# Altium PCB sw108.PcbDoc
Units mil, origin at the board's own origin, x right, y up, seen from the top; angles counter-clockwise.
Board outline 6000 x 4000 mil, 2 copper layers (Top Layer, Bottom Layer); 39 components, 28 nets, 165 pads, 26 vias.
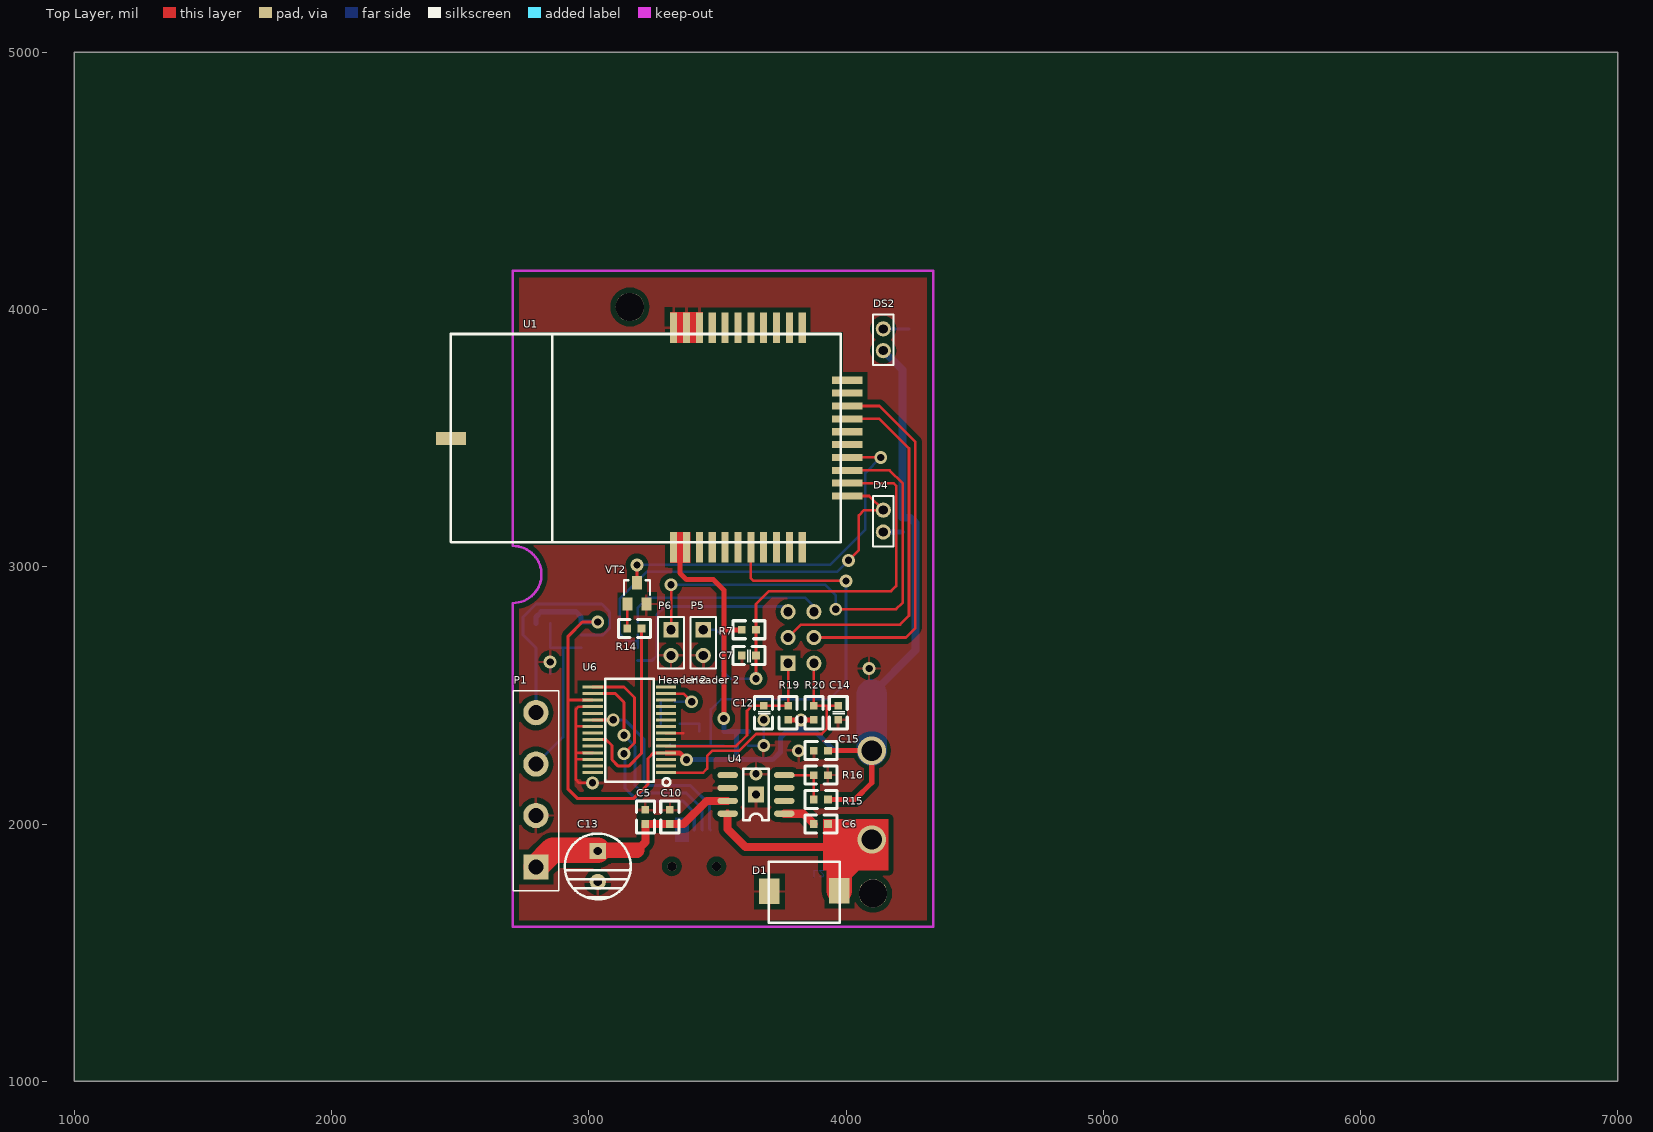
[diagram p0: Top Layer view]
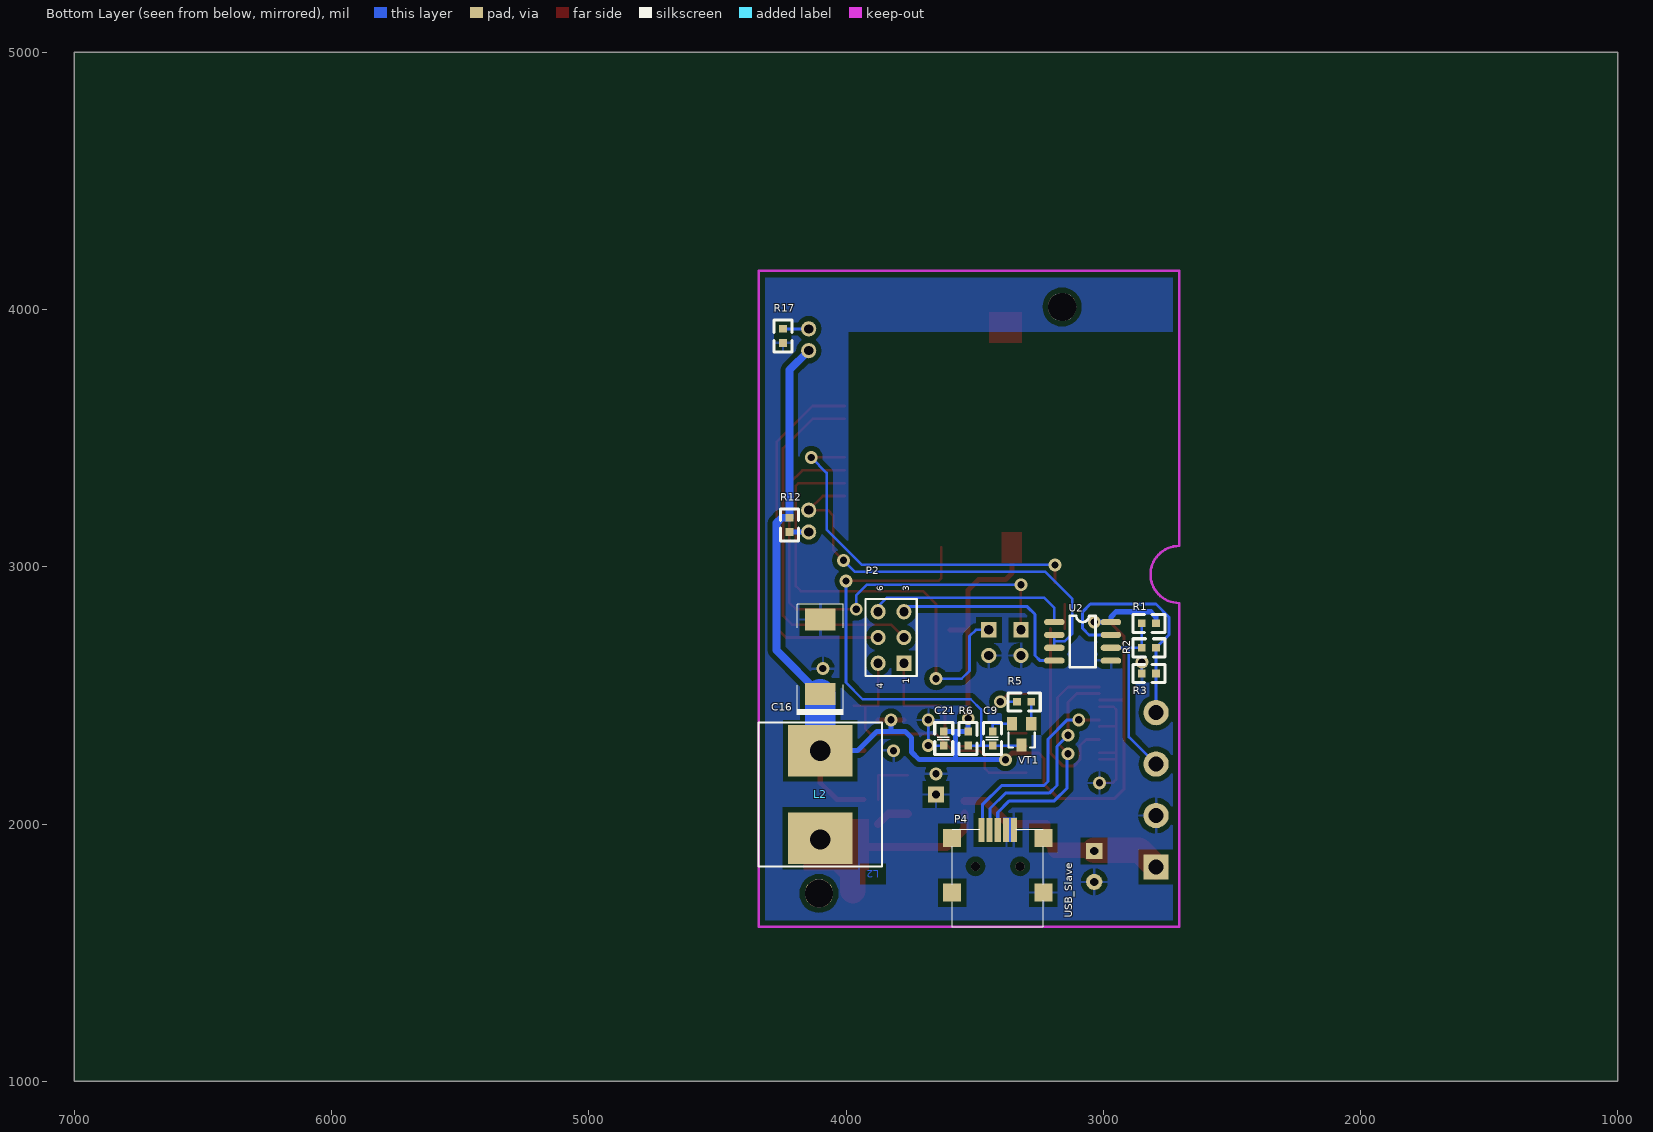
[diagram p1: Bottom Layer view, seen from below]

## Layer stack, top to bottom
Top Layer: signal copper 1.4
Dielectric: dielectric 12.6, FR-4, Dk 4.8
Bottom Layer: signal copper 1.4

## Board outline
1000,1000 7000,1000 7000,5000 1000,5000

## Design rules (kind name [scope] priority, off if disabled: settings)
Clearance Clearance_1 [InPolygon] p1: gap=20
Clearance [All] p2: gap=7
HoleSize [All] p1: absolutevalues=TRUE maxlimit=118.11 minlimit=1 maxpercent=80.000 minpercent=20.000
HoleToHoleClearance [All] p1: gap=0 allowstackedmicrovias=TRUE
MinimumSolderMaskSliver [All] p1: minsoldermaskwidth=0
PolygonConnect [All] p1: connectstyle=Relief reliefconductorwidth=10 reliefentries=4 polygonreliefangle="90 Angle" airgapwidth=10
RoutingVias [All] p1: holewidth=28 width=50 viastyle="Through Hole" minholewidth=28 minwidth=50 maxholewidth=78.74 maxwidth=110.24
ShortCircuit [All] p1: allowed=TRUE
SilkToSilkClearance [All] p1: silktosilkclearance=0
SilkToSolderMaskClearance SilkscreenOverComponentPads [IsPad] p1: minsilkscreentomaskgap=0 clearancetoexposedcopper=TRUE
SolderMaskExpansion [All] p1: expansion=4
Width [All] p1: maxlimit=157.48 minlimit=10 preferedwidth=10
22 further rules are at their usual default settings.

## Components (designator, comment, footprint, x,y, rotation, side; value= is the part's Value field where it differs from the comment)
C5 "4.7μF" C0603 3220,1955 r270 top
C6 "0.01μF" C0603 3975,2000 r0 top
C7 "0.1u" C0603 3695,2655 r0 top
C9 "0.1u" C0603 3430,2260 r270 bottom
C10 "4.7μF" C0603 3315,1955 r270 top
C12 "101" C0603 3680,2505 r90 top
C13 "220μF" CZ3.0/6.5 3035,1835 r90 top
C14 "101" C0603 3970,2505 r90 top
C15 "0.1μF" C0603 3830,2285 r180 top
C16 "476C" 7343 4100,2505 r90 bottom
C21 "104" C0603 3620,2260 r270 bottom
D1 "Diode 1N5408" UF3B 3900,1915 r0 top
D4 "green LED" LED 4225,3140 r90 top
DS2 "VDD33" LED 4225,3845 r90 top
L2 "15μH" L2 4100,2285 r180 bottom
P1 "485" 4kongzhen 2795,2125 r90 top
P2 "Header 3X2A" HDR2X3_CEN 3775,2625 r90 bottom
P4 "USB_Slave" USBfoot 3410,1855 r90 bottom
P5 "Header 2" HDR1X2 3445,2755 r270 top
P6 "Header 2" HDR1X2 3320,2755 r270 top
R1 "3.3K" R0603 2750,2780 r180 bottom
R2 "120ohm" R0603 2895,2685 r0 bottom
R3 "3.3K" R0603 2750,2585 r180 bottom
R5 "1K" R0603 3380,2475 r0 bottom
R6 "Res2" R0603 3525,2405 r90 bottom
R7 "Res2" R0603 3550,2755 r180 top
R12 "3.3K" R0603 4220,3090 r270 bottom
R14 "1K" R0603 3250,2760 r0 top
R15 "10K" R0603 3830,2095 r180 top
R16 "7580M\3.24K" R0603 3975,2190 r0 top
R17 "10K" R0603 4245,3970 r90 bottom
R19 "3.3k" R0603 3775,2505 r90 top
R20 "3.3k" R0603 3875,2505 r90 top
U1 "STM32W_1" STM32W108-3 3980,3905 r180 top
U2 "MAX3485CSA" SO-8 3190,2785 r180 bottom
U4 "5430" SO-8 3760,2040 r180 top
U6 "FT232R" SSOP-28 3300,2200 r180 top
VT1 "2N3904" SOT23-3 3280,2390 r0 bottom
VT2 "2N3904" SOT23-3 3150,2855 r0 top

## Footprints (in the part's own frame and the unit in brackets; to place one, negate y for a bottom-side part, rotate by r counter-clockwise, add the part's x,y. Pads: shape width x height; smd on the part's side, far side on the other; paste and mask are expansions set on the pad)
4kongzhen [mm]
  rect 2.5x2.5 hole 1.5: 1(-7.418,0.008)
  round 2.5 hole 1.5: 2(-2.338,0.008) 3(2.742,0.008) 4(7.822,0.008)
  silkscreen extent -9.75,-2.25 10,2.25
7343 [mm]
  rect 2.2x3 smd: 1(0,0) 2(7.366,0)
  silkscreen extent -2.03,-2.29 8.89,2.29
C0603 [mil]
  rect 30x30 smd: 1(-100,0) 2(-45,0)
  silkscreen extent -135,-35 -10,35
CZ3.0/6.5 [mm]
  rect 1.6x1.6 hole 0.8: 1(1.524,0)
  round 1.6 hole 0.8: 2(-1.524,0)
  silkscreen extent -3.25,-3.25 3.25,3.25
HDR1X2 [mm] "Connector; Header; 2 Position"
  rect 1.5x1.5 hole 0.9: 1(0,0)
  round 1.5 hole 0.9: 2(2.54,0)
  silkscreen extent -1.27,-1.27 3.81,1.27
HDR2X3_CEN [mm] "Connector; Header; 3x2 Position"
  rect 1.5x1.5 hole 0.9: 1(0,0)
  round 1.5 hole 0.9: 2(2.54,0) 3(5.08,0) 4(0,2.54) 5(2.54,2.54) 6(5.08,2.54)
  silkscreen extent -1.27,-1.27 6.35,3.81
L2 [mil]
  rect 250x200 smd: 1(0,0) 2(0,-340)
  silkscreen extent -240,-450 240,110
LED [mm]
  round 1.5 hole 0.9: 1(-0.127,2.032) 2(2.032,2.032)
  silkscreen extent -1.54,1.02 3.43,3.06
R0603 [mil]
  rect 30x30 smd: 1(-100,0) 2(-45,0)
  silkscreen extent -135,-35 -10,35
SO-8 [mil]
  oval 80x24 smd: 1(0,0) 2(0,-50) 3(0,-100) 4(0,-150) 5(220,-150) 6(220,-100) 7(220,-50) 8(220,0)
  silkscreen extent 60,-175 160,25
SOT23-3 [mm]
  rect 1x1.3 smd: 1(0,0) 2(1.9,0) 3(0.95,2.1)
  silkscreen extent -0.35,0.87 2.25,2.35
SSOP-28 [mm]
  rect 2x0.3 smd: 1(0,0) 2(0,-0.65) 3(0,-1.3) 4(0,-1.95) 5(0,-2.6) 6(0,-3.25) 7(0,-3.9) 8(0,-4.55) 9(0,-5.2) 10(0,-5.85) 11(0,-6.5) 12(0,-7.15) 13(0,-7.8) 14(0,-8.45) 15(7.239,-8.45) 16(7.239,-7.8) 17(7.239,-7.15) 18(7.239,-6.5) 19(7.239,-5.85) 20(7.239,-5.2) 21(7.239,-4.55) 22(7.239,-3.9) 23(7.239,-3.25) 24(7.239,-2.6) 25(7.239,-1.95) 26(7.239,-1.3) 27(7.239,-0.65) 28(7.239,0)
  silkscreen extent -0.43,-9.27 5.99,1.32
STM32W108-3 [mm]
  rect 0.7x3 smd: 1(16.51,21.074) 2(15.24,21.074) 3(13.97,21.074) 4(12.7,21.074) 5(11.43,21.074) 6(10.16,21.074) 7(8.89,21.074) 8(7.62,21.074) 9(6.35,21.074) 10(5.08,21.074) 11(3.81,21.074) 22(3.81,-0.627) 23(5.08,-0.627) 24(6.35,-0.627) 25(7.62,-0.627) 26(8.89,-0.627) 27(10.16,-0.627) 28(11.43,-0.627) 29(12.7,-0.627) 30(13.97,-0.627) 31(15.24,-0.627) 32(16.51,-0.627)
  rect 3x0.7 smd: 12(-0.627,16.002) 13(-0.627,14.732) 14(-0.627,13.462) 15(-0.627,12.192) 16(-0.627,10.922) 17(-0.627,9.652) 18(-0.627,8.382) 19(-0.627,7.112) 20(-0.627,5.842) 21(-0.627,4.572)
  rect 3x1.3 smd: ""(38.5,10.314)
  silkscreen extent 0,0 38.5,20.57
UF3B [mm]
  rect 2x2.5 smd: 1(-5.029,-4.496) 2(1.88,-4.445)
  silkscreen extent -5.08,-7.59 1.93,-1.57
USBfoot [mm]
  rect 2.4x0.6 smd: 1(3.1,1.6) 2(3.1,0.8) 3(3.1,0) 4(3.1,-0.8) 5(3.1,-1.6)
  rect 1.778x1.778 smd: 5(-3.1,-4.5) 6(2.3,-4.5) 7(2.3,4.5) 8(-3.1,4.5)
  silkscreen extent -6.5,-4.5 3.1,4.5

## Part data
C5 C6 C7 C9 C10 C12 C14 C15: library part Cap, "Capacitor"
C13 C16: library part "Cap Pol1", "Polarized Capacitor (Radial)"
C21: library part C, "C"
D1: "3 Amp Medium Power Silicon Rectifier Diode"
D4: library part LED
DS2: library part LED3, "Typical BLUE SiC LED"
L2: library part Inductor, "Inductor"
P1: library part "Header 4", "Header, 4-Pin"
P2: "Header, 3-Pin, Dual row"
P4: library part "Header 5", "Header, 5-Pin"
P5 P6: "Header, 2-Pin"
R1 R2 R3 R5 R12 R14 R17: library part RES, "R"
R6 R7: "Resistor"
R15 R16: library part Res2, "Resistor"
R19 R20: library part Res3, "Resistor"
U1: library part STM32W108-3
U2: library part MAX485CSA, "Low-Power, Slew-Rate-Limited RS-485/RS-422 Transceiver"
VT1 VT2: library part NPN, "NPN Transistor"

## Free pads (board coordinates)
  round 110.24 hole 110.24: 0(3160,4010) 0(4105,1730)
  rect 62.99x62.99 hole 30: 0(3650,2115)

## Via types
v1: diameter 50, hole 28, Top Layer to Bottom Layer, 22 vias
v2: diameter 35.43, hole 35.43, Top Layer to Bottom Layer, 2 vias
v3: diameter 110.24, hole 78.74, Top Layer to Bottom Layer, 2 vias

## Nets (pads, with @x,y where several pads share a name; then routed paths per layer and width w, separated by ;. In a path a pad name is that pad's centre, name@x,y a point inside that pad or via, vN(x,y) a via of type N, cw(c..) or ccw(c..) an arc to the next point about the centre after c; other vN are vias at no path point)
485_A: P1.3 R1.1 R2.2 U2.6 | length 710.7
  Bottom Layer w10: P1.3 2900,2338.27 2900,2685 ; R1.1 R2.2 2900,2685 ; U2.6 2900,2685
485_B: P1.4 R2.1 R3.2 U2.7 | length 945.9
  Bottom Layer w11.81: P1.4@2795,2433.27 R3.2 R2.1 2745,2735 2745,2805 2795,2855 3050,2855 3080,2825 3080,2760 3055,2735 U2.7
/RESET: C9.2 R6.1 U1.7 VT1.3 | length 1806.5
  Top Layer w10: U1.7 3630,2955 3640,2945 v1(4000,2945)
  Bottom Layer w10: VT1.3 3319.72,2305 C9.2 3475,2305 ; R6.1 3475,2305 ; v1(4000,2945) 4000,2550 3935,2485 3515,2485 3475,2445 3475,2305
BOOT: U1.15 VT2.3 | length 1456.7
  Top Layer w10: VT2.3 v1(3187.4,3007.4) v1@3192.5,3012.5 ; U1.15 v1(4135,3425)
  Bottom Layer w10: v1(3187.4,3007.4) 3937.4,3007.4 4075,3145 4075,3365 v1(4135,3425)
CARD: P6.1 U1.14 | length 1878
  Top Layer w10: P6.1 v1@3320,2940 ; v1(3960,2835) 4195,2835 4220,2860 4220,3325 4170,3375 U1.14
  Bottom Layer w10: v1@3320,2940 v1(3320,2930) 3920,2930 3960,2890 v1(3960,2835)
CBUS0: R14.2 U6.23 | length 770.6
  Top Layer w11.81: U6.23 3067.05,2327.95 3090,2305 3090,2250 3115,2225 3155,2225 3205,2275 R14.2
CBUS2: R5.2 U6.13 | length 178.3
  Top Layer w10: U6.13 3367.91,2507.09 v1(3400,2475)
  Bottom Layer w10: R5.2 v1(3400,2475)
GND: C5.1 C7.1 C9.1 C10.1 C12.1 C13.2 C14.1 C15.2 C16.2 C21.2 D1.1 P1.2 P4.4 P4.5 P5.2 P6.2 pad.0@3650,2115 R3.1 R16.2 R17.1 U1.30 U1.31 U1.32 U2.5 U4.6 U6.7 U6.18 U6.21 U6.25 U6.26 VT1.2 VT2.2 | length 984.9
  Top Layer w10: 2950,2251.18 U6.26 ; U6.21@3014.13,2379.13 U6.21 ; U6.21@3014.13,2380 2950,2380 ; v1(3015,2160) 2962.91,2160 2950,2172.91 2950,2260 2950,2280 ; U6.25 2953.23,2276.77 2950,2280 ; U6.18 2960.91,2455.91 2950,2445 2950,2380 ; U6.7 3366.46,2353.54 ; 2950,2280 2950,2380
  Bottom Layer w10: R3.1 v1(2850,2630) ; VT1.2 3430,2390 C9.1 ; C21.2 v1(3680,2305) v1(3680,2405)
  other v1: 3650,2195 3815,2285 4090,2605
KEY: C7.2 P5.1 R7.1 U1.13 | length 1811.2
  Top Layer w10: v1(3650,2565) C7.2 R7.1 3650,2855 3700,2905 4175,2905 4195,2925 4195,3315 4185,3325 U1.13
  Bottom Layer w10: P5.1 3495,2755 3520,2730 3520,2595 3550,2565 v1(3650,2565)
LED: D4.2 U1.12 U2.2 U2.3 | length 1677.5
  Top Layer w10: U1.12 4090,3275 D4.2 4070,3220 4050,3200 4050,3065 v1(4010,3025)
  Bottom Layer w10: U2.3 3190,2710 ; U2.2 3190,2710 ; v1(4010,3025) 3965,2980 3225,2980 3120,2875 3120,2740 3150,2710 3190,2710
NetC6_1: C6.1 U4.1 | length 131.6
  Top Layer w31.5: U4.1 3835,2040 C6.1
NetC6_2: C6.2 D1.2 L2.2 U4.8 | length 1066
  Top Layer w31.5: U4.8 3540,1980 3610,1910 4070,1910 v3(4100,1940) 4040,2000 C6.2
  Top Layer w98.43: D1.2 3974.02,1814.02 v3@4070,1910
NetD4_1: D4.1 R12.2 | length 75
  Bottom Layer w19.68: D4.1 R12.2
NetDS2_2: DS2.2 R17.2 | length 100
  Bottom Layer w11.81: DS2.2 R17.2
NetP4_1: P4.1 U6.20 | length 787.7
  Top Layer w11.81: U6.20 v1@3094.72,2404.72
  Top Layer w19.68: v1@3094.72,2404.72 v1(3095,2405)
  Bottom Layer w11.81: v1(3095,2405) 3140,2405 3215,2330 3215,2165 3230,2150 3395,2150 3470,2075 3470,1980.04 P4.1
NetP4_2: P4.2 U6.16 | length 890.8
  Top Layer w11.81: U6.16 3102.91,2507.09 3136.84,2473.16 v1(3136.84,2345.19) ; v1(3136.84,2345.19) 3140,2342.03 3140,2330 3136.84,2333.16 v1(3136.84,2345.19)
  Bottom Layer w11.81: v1(3136.84,2345.19) 3180,2302.03 3180,2150 3210,2120 3380,2120 3440,2060 3440,1978.55 P4.2
NetP4_3: P4.3 U6.15 | length 927.6
  Top Layer w11.81: U6.15 3137.32,2532.68 3178.1,2491.9 3178.1,2314.49 v1(3136.8,2273.2)
  Bottom Layer w11.81: v1(3136.8,2273.2) 3140,2270 3140,2140 3190,2090 3365,2090 3410,2045 P4.3
NetR5_1: R5.1 VT1.1 | length 85
  Bottom Layer w10: VT1.1 R5.1
NetR14_1: R14.1 VT2.1 | length 95
  Top Layer w10: R14.1 VT2.1
NetR15_2: R15.2 R16.1 U4.4 | length 210
  Top Layer w10: U4.4 R16.1 R15.2
UART_RXD: P2.5 U1.19 | length 1456.6
  Top Layer w10: P2.5 4232.91,2725 4270,2762.09 4270,3485 4130,3625 U1.19
"UART_RXD 485": P2.6 U2.1 | length 771.1
  Bottom Layer w10: U2.1 3190,2840 3230,2880 3840,2880 P2.6@3875,2845
UART_RXD_USB: C12.2 P2.1 R19.2 U6.5 | length 760.9
  Top Layer w10: U6.5 3572.36,2302.36 3615,2345 3615,2440 3635,2460 C12.2 R19.2 P2.1
UART_TXD: P2.2 U1.18 | length 1443.2
  Top Layer w10: P2.2 3825,2775 4210,2775 4245,2810 4245,3460 4130,3575 U1.18
"UART_TXD 485": P2.3 U2.4 | length 765.7
  Bottom Layer w11.81: U2.4 3245,2635 3265,2655 3265,2815 3295,2845 P2.3@3775,2845
UART_TXD_USB: C14.2 P2.4 R20.2 U6.1 | length 1074.7
  Top Layer w10: U6.1 3445,2200 3460,2215 3460,2265 3480.36,2285.36 3585.36,2285.36 3650,2350 3905,2350 3925,2370 3925,2460 ; P2.4 R20.2 3925,2460 ; C14.2 3925,2460
VCC_24V: C5.2 C10.2 C13.1 P1.1 U4.7 | length 892.8
  Top Layer w31.5: 3187.95,1897.95 3220,1930 C5.2 C10.2 3368.51,2000 3458.51,2090 U4.7
  Top Layer w59.06: C13.1@3035,1897.95 3187.95,1897.95
  Top Layer w98.43: P1.1 2859.68,1897.95 C13.1@3035,1897.95
VDD33: C15.1 C16.1 C21.1 DS2.1 L2.1 R1.2 R6.2 R7.2 R12.1 R15.1 R19.1 R20.1 U1.1 U1.2 U2.8 U6.4 U6.17 | length 6082.1
  Top Layer w11.81: 2920,2481.5 U6.17 U6.17@2977.06,2481.5 ; v1@3045,2785 2975,2785 2920,2730 2920,2135 2955,2100 3175,2100 3230,2155 3230,2255 3251.77,2276.77 U6.4
  Top Layer w19.68: U6.4 3353.23,2276.77 v1(3380,2250) ; 3355,3080 3355,2975 3380,2950 3485,2950 3525,2910 v1(3525,2410) ; 3525,2755 R7.2 ; R19.1 v1(3825,2405) R20.1 ; R15.1 4035,2095 4100,2160 v3(4100,2285) C15.1
  Bottom Layer w19.68: R1.2 2795,2805 2815,2825 2950,2825 2970,2805 U2.8 v1(3035,2785) ; v1(3380,2250) 3575,2250 ; v1(3525,2410) R6.2 3575,2360 ; C21.1 3575,2360 ; v1(3825,2405) 3825,2360 ; v3(4100,2285) 3955,2285 3880,2360 3825,2360 ; 3575,2250 3575,2360 ; 3575,2250 3715,2250 3745,2280 3745,2335 3770,2360 3825,2360
  Bottom Layer w30: C16.1 4270,2675 4270,3170 4250,3190 R12.1 4220,3765 DS2.1
  Bottom Layer w118.11: v3(4100,2285) C16.1
pads on no net: P4.6 P4.7 P4.8 U1. U1.3 U1.4 U1.5 U1.6 U1.8 U1.9 U1.10 U1.11 U1.16 U1.17 U1.20 U1.21 U1.22 U1.23 U1.24 U1.25 U1.26 U1.27 U1.28 U1.29 U4.2 U4.3 U4.5 U6.2 U6.3 U6.6 U6.8 U6.9 U6.10 U6.11 U6.12 U6.14 U6.19 U6.22 U6.24 U6.27 U6.28
copper on no net: | length 11.8
  Bottom Layer w11.81: 3033.22,2785 3045,2785
  other v2: 3323.39,1835.32 3496.61,1835.32

## Polygon pours and split planes (outlines as drawn)
GND on Top Layer "Top Layer-No Net" (solid, remove dead copper, pour order 1000): 2714.73,4138.23 4329.73,4138.23 4329.73,1608.23 2714.73,1608.23 2714.73,1628.23 2714.73,3083.23 3989.73,3083.23 3989.73,3913.23 2714.73,3913.23 2714.73,4138.23
GND on Bottom Layer "Top Layer-No Net" (solid, remove dead copper, pour order 1001): 2715.49,4137.99 4330.49,4137.99 4330.49,1607.99 2715.49,1607.99 2715.49,1627.99 2715.49,3082.99 3990.49,3082.99 3990.49,3912.99 2715.49,3912.99 2715.49,4137.99

## Keep-outs
Keep-Out Layer:
  lines w10: 2705,1600 2705,2858.98 ccw(c2705,2970) 2705,3081.02 2705,4150 4340,4150 4340,1600 2705,1600

## Other copper
Top Layer:
  rectangle net VDD33: 3315,3015 3395,3135
  rectangle net NetC6_2: 3910,1820 4165,2020
  rectangle net GND: 3315,3870 3445,3990
Bottom Layer:
  rectangle net GND: 3335,1930 3390,2025

## Text inside footprints (layer, text, board x,y; h text height)
P2: Bottom Overlay "6" at 3855,2905 h25 r270; Bottom Overlay "3" at 3755,2905 h25 r270; Bottom Overlay "1" at 3755,2545 h25 r270; Bottom Overlay "4" at 3855,2525 h25 r270